# EAGLE board blinkm_mk2b1 (EAGLE 6.4)
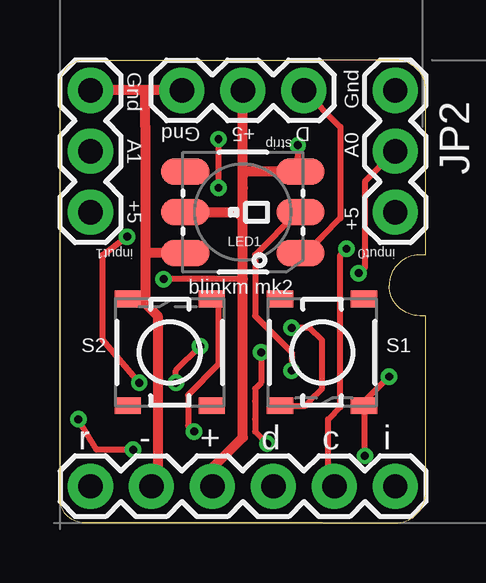
[diagram p0: board, top side]
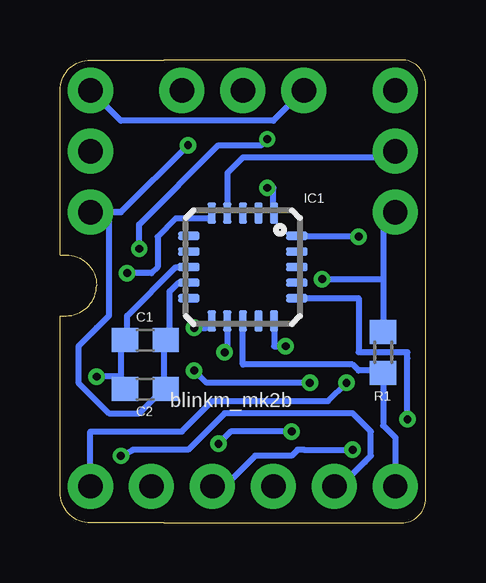
[diagram p1: board, bottom side, seen from below]

Size 15.24 x 19.3 mm. Coordinates in mm from the lower left corner, seen from the top.
Outline: 10.92,0 1.02,0 arc-90 0,1.02 0,18.29 arc-90 1.02,19.3 10.92,19.3 13.97,19.3 arc-90 15.24,18.03 15.24,11.18 14.99,11.18 arc90 13.72,9.91 arc90 14.99,8.64 15.24,8.64 15.24,1.27 arc-90 13.97,0 10.92,0
Copper layers (1*16): Top 0.0356mm / dielectric 1.5011mm / Bottom 0.0356mm
Design rules "LaenPCBOrder-tod": minimum track width 10mil, minimum drill 13mil, track to track 6mil, track to pad 8mil, pad to pad 8mil, via to via 8mil, smd to smd 6mil, copper to edge 15mil, drill to drill 8mil, minimum pad ring 7mil, minimum via ring 7mil, stop-mask expansion 4mil, vias tented up to drill 25mil, thermal gap 10mil
tRestrict: area -1.3,3.8 to 0,11.4
bRestrict: area 6.3,9.7 to 8.9,11.9

## Footprints (pad centres in the part's own frame; a part is rotated, then mirrored left to right if it is on the bottom)
C0603 = smd 1.1 x 1: 1 -0.85,0; 2 0.85,0
QFN/MLF20 = smd 0.9 x 0.35: 1 -2.25,1.3; 2 -2.25,0.65; 3 -2.25,0; 4 -2.25,-0.65; 5 -2.25,-1.3; 11 2.25,-1.3; 12 2.25,-0.65; 13 2.25,0; 14 2.25,0.65; 15 2.25,1.3 | smd 0.35 x 0.9: 6 -1.3,-2.25; 7 -0.65,-2.25; 8 0,-2.25; 9 0.65,-2.25; 10 1.3,-2.25; 16 1.3,2.25; 17 0.65,2.25; 18 0,2.25; 19 -0.65,2.25; 20 -1.3,2.25
1X03 = drill 1.016 pad 1.88: 1 0,0; 2 2.54,0; 3 5.08,0
1X06 = drill 1.016 pad 1.88: 1 0,0; 2 2.54,0; 3 5.08,0; 4 7.62,0; 5 10.16,0; 6 12.7,0
LED-TRICOLOR-5050-IC = smd 2 x 1.1: 1 -2.4,1.7; 2 -2.4,0; 3 -2.4,-1.7; 4 2.4,-1.7; 5 2.4,0; 6 2.4,1.7
R0603 = smd 1 x 1.1: 1 -0.85,0; 2 0.85,0
TACTILE_SWITCH_SMD-2 = smd 0.7 x 1.1: 1 2.225,1.75; 2 2.225,-1.75; 3 -2.225,-1.75; 4 -2.225,1.75

## Placement (x,y rotation side)
C1  100nF  [C0603]  11.68,7.62 180 bottom
C2  10uF  [C0603]  11.68,5.59 180 bottom
IC1  ATTINY24/44/84-MU  [QFN/MLF20]  7.62,10.67 270 bottom
JP1  strip  [1X03]  10.16,18.03 180 top
JP2  input0  [1X03]  13.97,18.03 270 top
JP3  input1  [1X03]  1.27,18.03 270 top
JP4  [1X06]  1.27,1.52 0 top
LED1  LED-TRICOLOR-5050-ICWS2811  [LED-TRICOLOR-5050-IC]  7.62,12.95 180 top
R1  10k  [R0603]  1.78,7.11 90 bottom
S1  SWITCH-MOMENTARY-2SMD-2  [TACTILE_SWITCH_SMD-2]  10.92,7.11 270 top
S2  SWITCH-MOMENTARY-2SMD-2  [TACTILE_SWITCH_SMD-2]  4.57,7.11 90 top

## Library data of the parts
C1 C2 R1 = rcl
IC1 = attiny24_44_84
JP1-JP3 = SparkFun-20110517
JP4 = SparkFun-Connectors
LED1 = SparkFun-LED
S1 S2 = SparkFun-Electromechanical

## Nets
+5V: C1.1 C2.1 IC1.9 JP1.2 JP2.3 JP3.3 JP4.3 LED1.3 LED1.5 R1.2
A0: IC1.5 JP2.2
A1: IC1.4 JP3.2
A2: IC1.3
DI: IC1.15 LED1.2
DO: JP1.1 LED1.1
GND: C1.2 C2.2 IC1.8 JP1.3 JP2.1 JP3.1 JP4.2 LED1.6 S1.1 S2.1
MISO: IC1.20 JP4.6
RESET: IC1.13 JP4.1 R1.1
S1: IC1.11 S1.2
S2: IC1.12 S2.2
SCL: IC1.1 JP4.5
SDA: IC1.16 JP4.4

## Tracks (layer width: path | path; a pad name or v marks a point on that pad's centre or on a via)
+5V  (via drill 0.33)
  Top 0.254: 7.62,10.16 v4.32,10.16 | v9.91,15.75 9.91,15.24 10.16,14.73 LED1.3
  Top 0.406: JP4.3 6.35,2.29 7.62,3.56 7.62,10.16 7.62,12.7 | 7.62,12.7 7.62,14.48 | 7.62,14.48 JP1.2 | LED1.5 7.37,12.95 7.62,12.7 | 7.62,12.7 7.62,13.97 | LED1.3 9.4,14.65 7.62,14.65 7.62,14.48
  Bottom 0.254: 1.78,10.16 1.78,12.95 JP3.3 | 1.78,10.16 1.78,8.13 R1.2 | v4.32,10.16 1.78,10.16 | 10.92,5.59 10.92,7.62 C1.1 10.67,7.62 10.67,9.65 10.41,9.91 10.3,10.02 IC1.9 | 10.92,5.59 C2.1 10.92,5.59 | 10.92,5.59 11.94,4.57 13.21,4.57 14.48,5.84 14.48,7.37 13.72,8.13 13.21,8.64 13.21,12.95 12.7,12.95 | 12.7,12.95 JP2.3 12.7,12.95 | 12.7,12.95 v9.91,15.75
A0  (via drill 0.33)
  Top 0.254: v12.45,10.41 12.7,10.67 12.7,14.22 JP2.2
  Bottom 0.254: IC1.5 8.89,12.7 10.41,12.7 11.18,11.94 11.18,10.67 11.43,10.41 v12.45,10.41
A1
  Bottom 0.254: JP3.2 1.52,15.24 7.62,15.24 7.87,14.99 8.27,14.59 IC1.4
DI  (via drill 0.33)
  Top 0.254: v5.84,7.37 4.83,6.35 v4.83,5.84 | v9.65,6.35 9.65,7.11 9.14,7.62 8.13,8.64 8.13,11.18 9.91,12.95 LED1.2
  Bottom 0.254: v4.83,5.84 5.08,5.84 8.13,5.84 9.14,5.84 v9.65,6.35 | IC1.15 6.32,7.37 v5.84,7.37
DO
  Top 0.254: JP1.1 11.68,16.51 11.68,12.95 11.68,12.7 10.92,11.94 10.24,11.25 LED1.1
GND  (via drill 0.33)
  Top 0.254: v13.72,6.1 12.7,5.08 S1.1 12.45,4.83 12.7,4.83 v12.7,2.79
  Top 0.406: JP1.3 3.56,18.03 | 3.56,18.03 JP3.1 | 3.56,11.18 3.56,16.51 3.56,18.03 | 3.56,11.18 3.56,9.14 | 3.56,9.14 4.06,8.64 4.06,2.03 JP4.2 | 3.56,9.14 3.36,9.34 S2.1 | LED1.6 3.63,11.25 3.56,11.18
  Bottom 0.254: 9.91,10.67 IC1.8 | 9.91,10.67 IC1.8 | 9.91,10.67 10.41,10.67 12.45,8.64 12.45,7.62 C1.2 12.7,7.62 12.7,6.1 | 9.91,10.67 IC1.8 | 12.7,6.1 12.7,5.59 C2.2 | 12.7,6.1 v13.72,6.1 | JP2.1 12.7,16.76 6.35,16.76 JP1.3 | v12.7,2.79 12.19,3.05 9.91,3.05 8.38,4.57 3.05,4.57 2.29,3.81 2.29,2.79 2.54,2.54 3.56,1.52 JP4.2
  pour Top: 21.34,22.86 21.34,0 20.07,0 20.07,22.86
MISO  (via drill 0.33)
  Top 0.254: v2.79,11.94 1.78,11.18 1.78,7.62 v3.3,5.84
  Bottom 0.254: v2.79,11.94 5.33,11.94 IC1.20 | v3.3,5.84 4.06,5.08 8.89,5.08 10.16,3.81 13.97,3.81 13.97,2.29 JP4.6
RESET
  Bottom 0.254: IC1.13 7.62,8.38 7.62,6.6 3.05,6.6 2.79,6.35 1.78,6.35 R1.1 1.78,6.1 1.78,4.06 1.27,3.56 JP4.1
S1  (via drill 0.33)
  Top 0.254: v9.65,8.13 10.41,8.13 10.92,7.62 10.92,5.59 10.41,5.08 10.22,4.89 S1.2
  Bottom 0.254: v9.65,8.13 9.14,8.13 8.89,8.38 IC1.11
S2  (via drill 0.33)
  Top 0.254: v5.59,3.81 5.33,4.06 5.33,5.33 6.6,6.6 6.6,9.14 S2.2 | v8.38,7.11 8.38,5.84 8.13,5.59 8.13,5.08 8.13,4.32 8.13,3.81 v8.64,3.3
  Bottom 0.254: v5.59,3.81 8.13,3.81 v8.64,3.3 | IC1.12 8.27,7.22 v8.38,7.11
SCL  (via drill 0.33)
  Top 0.254: v6.6,16 v6.6,13.97 | v11.94,11.43 11.68,11.18 11.68,4.83 11.18,4.32 11.18,1.78 JP4.5
  Bottom 0.254: v6.6,13.97 6.35,13.97 6.35,12.95 IC1.1 | v6.6,16 6.86,15.75 8.13,15.75 8.64,15.75 11.94,12.45 v11.94,11.43
SDA  (via drill 0.33)
  Top 0.254: v0.76,4.32 1.52,3.05 1.78,3.05 v3.05,3.05
  Bottom 0.254: v0.76,4.32 0.76,6.86 0.76,7.11 2.79,7.11 2.79,9.37 3.27,9.37 4.03,9.37 IC1.16 | v3.05,3.05 5.08,3.05 5.33,3.05 5.59,2.79 7.11,2.79 8.38,1.52 JP4.4

## Text on the board
tPlace: Gnd | Gnd | +5 | D | Gnd | A1 | strip | A0 | +5 | +5 | input1 | input0 | blinkm mk2 | r | - | + | d | c | i
bPlace: blinkm_mk2b